# EAGLE board Keyboard_Scanner_Dual (EAGLE 9.5.0)
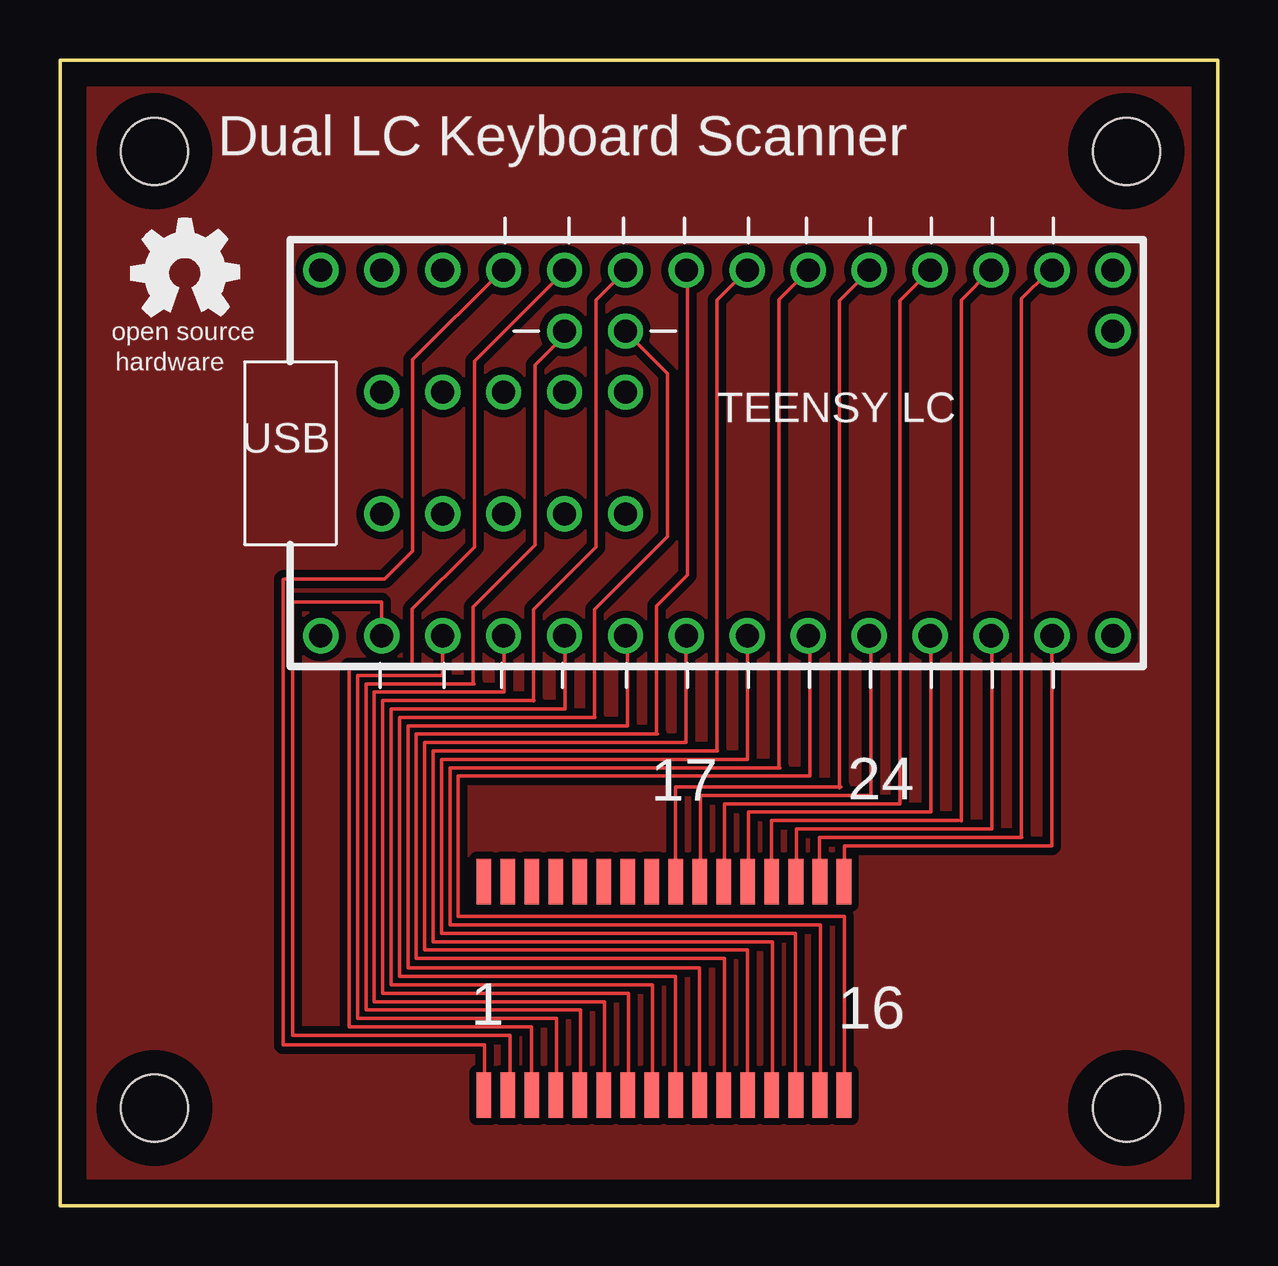
[diagram p0: board, top side]
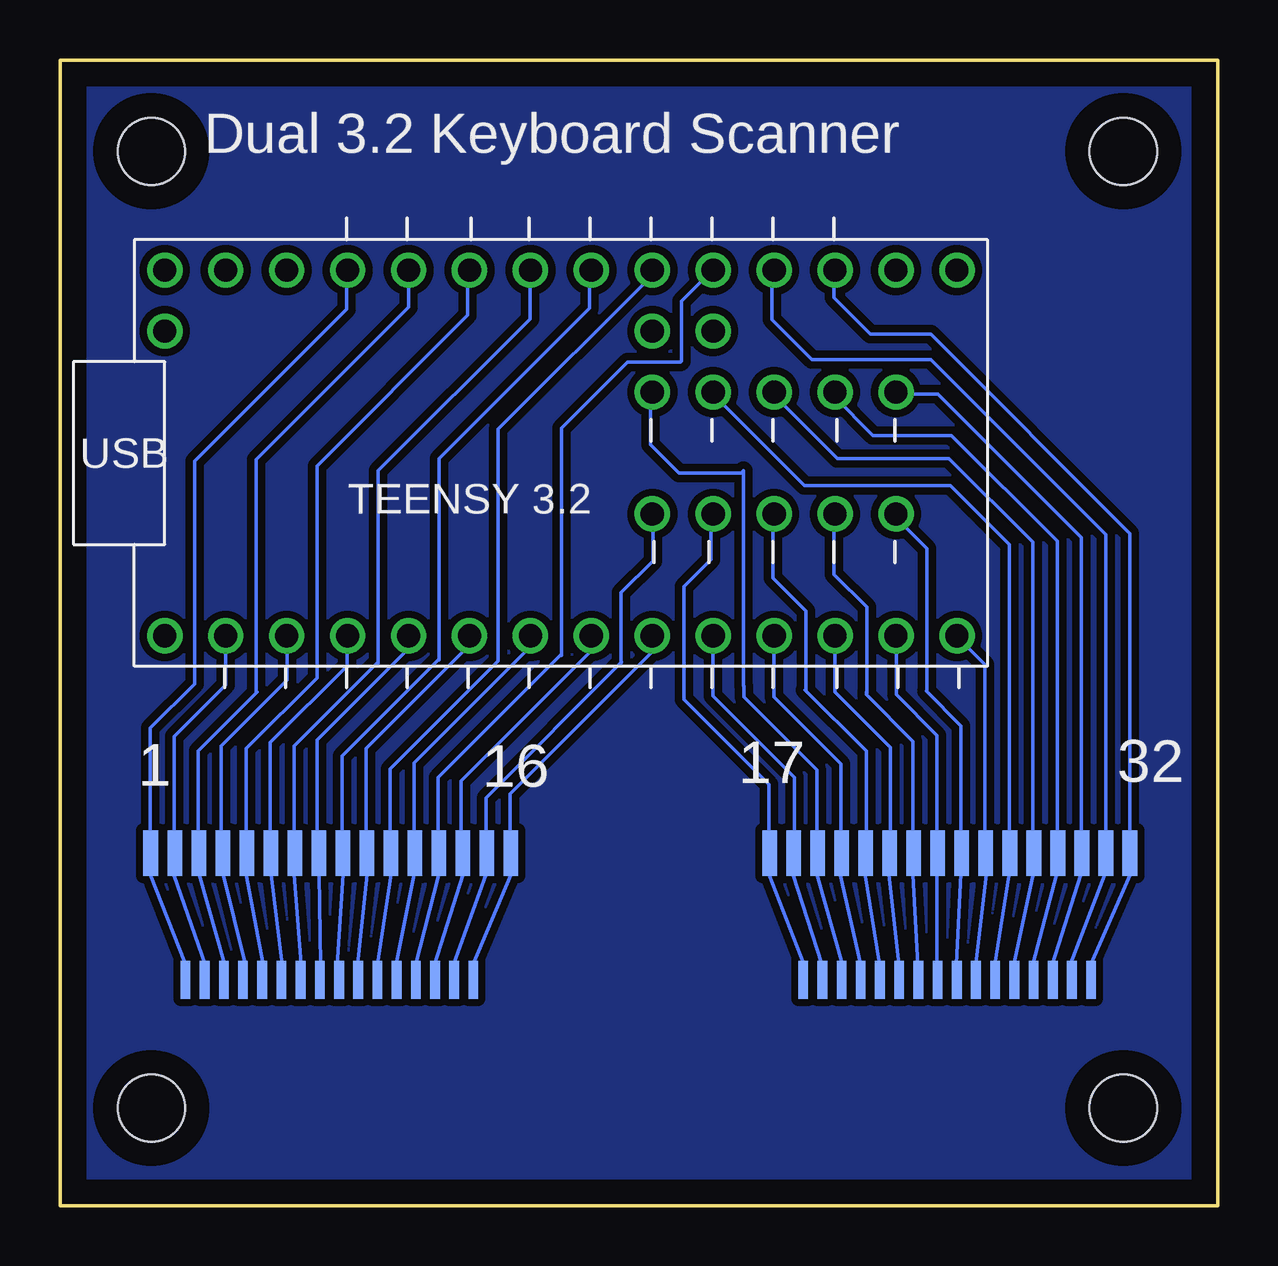
[diagram p1: board, bottom side, seen from below]

Size 48.26 x 47.75 mm. Coordinates in mm from the lower left corner, seen from the top.
Outline: 0,0 0,47.75 48.26,47.75 48.26,0 0,0
Copper layers (1*16): Top 0.035mm / dielectric 1.5mm / Bottom 0.035mm
Design rules "default": minimum track width 6mil, minimum drill 0.35mm, track to track 6mil, track to pad 6mil, pad to pad 6mil, via to via 6mil, smd to smd 6mil, copper to edge 40mil, drill to drill 6mil, minimum pad ring 10mil, minimum via ring 8mil, stop-mask expansion 4mil, vias tented up to drill 0mil, thermal gap 10mil
Holes 2.8 mm at 44.45,4.06 44.45,43.94 3.94,43.94 3.94,4.06

## Footprints (pad centres in the part's own frame; a part is rotated, then mirrored left to right if it is on the bottom)
TEENSY_COMBO = drill 0.965: 1 -11.43,7.62; 2 -13.97,7.62; 3 -16.51,7.62; 4 -6.35,5.08; 5 -3.81,5.08; 6 -3.81,2.54; 7 -6.35,2.54; 8 -8.89,2.54; 9 -11.43,2.54; 10 -13.97,2.54; 11 -13.97,-2.54; 12 -11.43,-2.54; 13 -8.89,-2.54; 14 -6.35,-2.54; 15 -3.81,-2.54; A -16.51,-7.62; B -13.97,-7.62; C -11.43,-7.62; D -8.89,-7.62; E -6.35,-7.62; F -3.81,-7.62; G -1.27,-7.62; H 1.27,-7.62; I 3.81,-7.62; J 6.35,-7.62; K 8.89,-7.62; L 11.43,-7.62; M 13.97,-7.62; N 16.51,-7.62; O 16.51,5.08; P 16.51,7.62; Q 13.97,7.62; R 11.43,7.62; S 8.89,7.62; T 6.35,7.62; U 3.81,7.62; V 1.27,7.62; W -1.27,7.62; X -3.81,7.62; Y -6.35,7.62; Z -8.89,7.62
FPC_DUAL = smd 0.61 x 1.905: 1 8.026,4.699; 2 7.026,4.699; 3 6.025,4.699; 4 5.024,4.699; 5 4.023,4.699; 6 3.023,4.699; 7 2.022,4.699; 8 1.021,4.699; 9 0.02,4.699; 10 -0.98,4.699; 11 -1.981,4.699; 12 -2.982,4.699; 13 -3.983,4.699; 14 -4.983,4.699; 15 -5.984,4.699; 16 -6.985,4.699; 17 8.026,-4.191; 18 7.026,-4.191; 19 6.025,-4.191; 20 5.024,-4.191; 21 4.023,-4.191; 22 3.023,-4.191; 23 2.022,-4.191; 24 1.021,-4.191; 25 0.02,-4.191; 26 -0.98,-4.191; 27 -1.981,-4.191; 28 -2.982,-4.191; 29 -3.983,-4.191; 30 -4.983,-4.191; 31 -5.984,-4.191; 32 -6.985,-4.191
FPC_DUAL_FRONT = smd 0.61 x 1.905 bottom: 1 8.026,0.889; 2 7.026,0.889; 3 6.025,0.889; 4 5.024,0.889; 5 4.023,0.889; 6 3.023,0.889; 7 2.022,0.889; 8 1.021,0.889; 9 0.02,0.889; 10 -0.98,0.889; 11 -1.981,0.889; 12 -2.982,0.889; 13 -3.983,0.889; 14 -4.983,0.889; 15 -5.984,0.889; 16 -6.985,0.889
FPC_DUAL_FRONT' = smd 0.406 x 0.813 bottom: 27 6.68,0.889; 28 5.88,0.889; 29 5.08,0.889; 30 4.28,0.889; 31 3.48,0.889; 32 2.68,0.889; 33 1.88,0.889; 34 1.079,0.889; 35 0.279,0.889; 36 -0.521,0.889; 37 -1.321,0.889; 38 -2.121,0.889; 39 -2.921,0.889; 40 -3.721,0.889; 41 -4.521,0.889; 42 -5.321,0.889; 63 -5.321,0.127; 64 -4.521,0.127; 65 -3.721,0.127; 66 -2.921,0.127; 67 -2.121,0.127; 68 -1.321,0.127; 69 -0.521,0.127; 70 0.279,0.127; 71 1.079,0.127; 72 1.88,0.127; 73 2.68,0.127; 74 3.48,0.127; 75 4.28,0.127; 76 5.08,0.127; 77 5.88,0.127; 78 6.68,0.127

## Placement (x,y rotation side)
E$1  [TEENSY_COMBO]  27.38,31.37 0 top
E$2  [FPC_DUAL]  24.65,8.8 0 top
E$3  [FPC_DUAL_FRONT]  10.65,13.8 0 top
E$4  [OSHW_5MM]  5.21,38.86 0 top
E$5  [FPC_DUAL_FRONT]  36.45,13.8 0 top
E$6  [FPC_DUAL_FRONT']  10.6,8.9 0 top
E$7  [FPC_DUAL_FRONT']  36.35,8.9 0 top

## Library data of the parts
E$1 = Teensy_Combo
E$2 = FPC_twin_front
E$3 E$5 = FPC_single_back_1mm
E$4 = oshw
E$6 E$7 = FPC_single_back_0p8mm

## Nets
S$33: E$1.R

## Tracks (layer width: path | path; a pad name or v marks a point on that pad's centre or on a via)
S$1
  Top 0.152: 13.45,23.8 13.4,23.8 13.4,25.15 9.7,25.15 9.7,7.1 18.75,7.1 18.75,5.5
S$2
  Top 0.152: 28.65,23.45 28.65,18.6 15.9,18.6 15.9,11.35
S$3
  Top 0.152: 16.25,11.75 16.25,18.25 30,18.25
S$4
  Top 0.152: 26.7,14.35 26.7,17.1 33.8,17.1 33.8,23.5
S$5
  Top 0.152: 28.7,14.35 28.7,16.4 36.3,16.4 36.3,23.6
S$6
  Top 0.152: 30.7,14.35 30.7,15.7 38.85,15.7 38.85,23.55
S$7
  Top 0.152: 41.35,23.55 41.35,15
S$8
  Top 0.152: 16.6,12.05 32.7,12.05 32.7,5.4
S$9
  Top 0.152: 27.4,18.95 15.55,18.95 15.55,11 29.7,11 29.7,5.45
S$10
  Top 0.152: 26.1,23.55 26.1,19.3 15.2,19.3 15.2,10.65 28.65,10.65 28.65,5.5
S$11
  Top 0.152: 23.6,23.6 23.65,23.6 23.65,20 14.5,20 14.5,9.9 26.65,9.9 26.65,5.5
S$12
  Top 0.152: 18.5,23.4 18.5,21.4
S$13
  Top 0.152: 15.95,23.65 15.95,22.1 12.4,22.1 12.4,7.8 20.7,7.8 20.7,5.5
S$14
  Bottom 0.152: 34.5,15.45 34.5,18.2 30,22.7 30,32.35
S$15
  Top 0.152: 14.7,22.45 12.05,22.45 12.05,7.45 19.65,7.45 19.65,5.55
S$16
  Top 0.152: 17.25,21.75 12.75,21.75 12.75,8.15 21.7,8.15 21.7,5.5
S$17
  Top 0.152: 18.5,21.4 13.1,21.4 13.1,8.5 22.7,8.5 22.7,5.45
S$18
  Top 0.152: 19.75,21.05 13.45,21.05 13.45,8.85 23.7,8.85 23.7,5.35
S$19
  Top 0.152: 21.05,23.65 21.05,20.7 13.8,20.7 13.8,9.2 24.7,9.2 24.7,5.35
S$20
  Top 0.152: 22.3,20.35 14.15,20.35 14.15,9.55 25.65,9.55 25.65,5.4
S$21
  Top 0.152: 24.9,19.65 14.85,19.65 14.85,10.3 27.7,10.3 27.7,5.5
S$22
  Top 0.152: 16.6,12.05 16.6,17.9 31.25,17.9 31.25,23.65
S$23
  Top 0.152: 25.65,14.3 25.65,17.45 32.55,17.45
S$24
  Top 0.152: 27.7,14.3 27.7,16.75 35,16.75
S$25
  Top 0.152: 29.65,14.3 29.65,16.05 37.45,16.05
S$26
  Top 0.152: 31.65,14.35 31.65,15.35 40.1,15.35
S$27
  Top 0.152: 32.7,14.15 32.7,15 41.35,15
S$28
  Top 0.152: 43.92,36.4 43.74,36.4
S$29
  Top 0.152: 16.25,11.7 31.7,11.7 31.7,5.45
S$30
  Top 0.152: 15.9,11.35 30.65,11.35 30.65,5.45
S$31
  Top 0.152: 41.33,38.91 41.2,38.91 40.08,37.8 40.08,15.37
S$32
  Top 0.152: 17.7,5.4 17.7,6.7 9.3,6.7 9.3,16.75 9.3,16.85 9.3,26.1
S$33
  Top 0.152: E$1.R 37.57,37.74 37.57,16.03
S$34
  Bottom 0.152: 10.85,23.7 9.7,22.55 9.7,15.45
S$35
  Top 0.152: 36.22,38.91 36.2,38.91 35,37.72 35,16.75
S$36
  Bottom 0.152: 12.15,21.45 10.7,20 10.7,15.5
S$37
  Top 0.152: 33.73,38.91 33.66,38.91
S$38
  Bottom 0.152: 13.4,23.7 13.4,21.3 11.7,19.6 11.7,15.5 11.75,15.45
S$39
  Top 0.152: 33.73,38.94 33.71,38.94 32.49,37.72 32.49,17.42
S$40
  Bottom 0.152: 14.65,21.4 14.65,21.3 12.7,19.35 12.7,15.45
S$41
  Top 0.152: 31.11,38.94 31.11,38.91 29.97,37.77 29.97,18.26
S$42
  Bottom 0.152: 15.95,23.7 15.95,21.4 13.65,19.1 13.65,15.45
S$43
  Top 0.152: 28.65,39.01 27.38,37.74 27.38,18.98
S$44
  Bottom 0.152: 17.2,21.5 14.65,18.95 14.65,15.5
S$45
  Top 0.152: 26.16,38.91 26.16,26.29 24.87,24.99 24.87,19.7
S$46
  Bottom 0.152: 18.5,23.75 18.5,21.2 15.7,18.4 15.7,15.5
S$47
  Top 0.152: 23.65,36.45 23.65,36.35 25.32,34.67 25.32,27.89 22.28,24.84 22.28,20.38
S$48
  Bottom 0.152: 19.75,21.65 19.75,21.2 16.7,18.15 16.7,15.5
S$49
  Top 0.152: 23.57,38.91 23.52,38.91 22.35,37.74 22.35,27.46 19.74,24.84 19.74,21.04
S$50
  Bottom 0.152: 21.05,23.75 21.05,21.25 17.65,17.85 17.65,15.5
S$51
  Top 0.152: 21.08,36.37 21.08,36.3 19.81,35.03 19.81,27.53 17.22,24.94 17.22,21.82
S$52
  Bottom 0.152: 22.25,21.7 22.25,21.1 18.7,17.55 18.7,15.5
S$53
  Top 0.152: 21.06,38.94 21.01,38.94 17.27,35.2 17.27,27.46 14.68,24.87 14.68,22.45
S$54
  Bottom 0.152: 42.65,21.75 44.5,19.9 44.5,15.4 44.5,15.35
S$55
  Top 0.152: 18.44,38.91 18.36,38.91 14.71,35.26 14.71,27.28 13.54,26.11 9.37,26.11
S$56
  Bottom 0.152: 41.35,23.75 41.35,21.7 43.5,19.55 43.5,15.45
S$57
  Bottom 0.152: 40.05,21.4 42.5,18.95 42.5,15.4
S$58
  Bottom 0.152: 38.8,23.75 38.8,21.9 41.55,19.15 41.55,15.55 41.55,15.45
S$59
  Bottom 0.152: 37.55,22 40.5,19.05 40.5,15.5
S$60
  Bottom 0.152: 36.3,23.75 36.3,22.5 39.5,19.3 39.5,15.55 39.55,15.5
S$61
  Bottom 0.152: 35,22.65 38.5,19.15 38.5,15.45
S$62
  Bottom 0.152: 33.75,23.75 33.75,23.2 37.55,19.4 37.55,15.5
S$63
  Bottom 0.152: 32.5,22.75 36.5,18.75 36.5,15.55 36.5,15.5
S$64
  Bottom 0.152: 31.25,23.75 31.25,23.3 35.5,19.05 35.5,15.45
S$65
  Bottom 0.152: 28.6,23.75 28.6,23.35 33.5,18.45 33.5,15.35
S$66
  Bottom 0.152: 27.4,22.95 32.5,17.85 32.5,15.45
S$67
  Bottom 0.152: 26.15,23.7 26.15,23.1 31.55,17.7 31.55,15.35 31.45,15.25
S$68
  Bottom 0.152: 24.85,22.65 30.5,17 30.5,15.4
S$69
  Bottom 0.152: 23.6,23.75 23.6,23.05 29.5,17.15 29.5,15.3
S$70
  Bottom 0.152: 3.65,13.8 5.3,10.05
S$71
  Bottom 0.152: 4.7,13.8 6.15,10.05
S$72
  Bottom 0.152: 5.7,13.8 6.9,10.05
S$73
  Bottom 0.152: 6.7,13.85 7.7,10.05
S$74
  Bottom 0.152: 7.7,13.75 8.5,10.05
S$75
  Bottom 0.152: 8.7,13.75 9.3,10.05
S$76
  Bottom 0.152: 9.65,13.8 10.1,9.9 10.1,9.95
S$77
  Bottom 0.152: 10.7,13.85 10.9,10.05
S$78
  Bottom 0.152: 11.7,13.8 11.7,10.05 11.7,10
S$79
  Bottom 0.152: 12.7,13.8 12.5,10
S$80
  Bottom 0.152: 13.7,13.8 13.3,10.05
S$81
  Bottom 0.152: 14.7,13.85 14.1,10.1
S$82
  Bottom 0.152: 15.75,13.85 14.9,10.1
S$83
  Bottom 0.152: 16.7,13.8 15.65,10.05
S$84
  Bottom 0.152: 17.7,13.8 16.5,10.05
S$85
  Bottom 0.152: 18.7,13.8 17.25,10.05
S$86
  Bottom 0.152: 29.45,13.8 31.05,10.05
S$87
  Bottom 0.152: 30.5,13.8 31.85,10.05
S$88
  Bottom 0.152: 31.45,13.8 32.65,10.05
S$89
  Bottom 0.152: 32.45,13.85 33.45,9.95
S$90
  Bottom 0.152: 36.32,38.91 36.32,37.36 42.65,31.04 42.65,21.74
S$91
  Bottom 0.152: 33.5,13.8 34.25,10.05
S$92
  Bottom 0.152: 33.73,38.91 33.73,37.44 40.08,31.09 40.08,21.41
S$93
  Bottom 0.152: 34.45,13.8 35.05,9.95
S$94
  Bottom 0.152: 31.27,38.96 31.27,37.11 37.54,30.84 37.54,22
S$95
  Bottom 0.152: 35.45,13.8 35.85,10.05
S$96
  Bottom 0.152: 28.68,38.91 28.68,36.96 35,30.63 35,22.59
S$97
  Bottom 0.152: 36.45,13.8 36.7,10
S$98
  Bottom 0.152: 26.19,38.91 26.19,37.41 32.46,31.14 32.46,22.73
S$99
  Bottom 0.152: 37.45,13.8 37.4,10.05
S$100
  Bottom 0.152: 23.65,38.96 23.65,38.71 30,32.36
S$101
  Bottom 0.152: 38.5,13.8 38.2,10.05
S$102
  Bottom 0.152: 21.03,38.96 21.08,38.96 22.35,37.69 22.35,35.2 22.4,35.15 24.61,35.15 27.36,32.41 27.36,22.93
S$103
  Bottom 0.152: 39.45,13.8 39,10.05
S$104
  Bottom 0.152: 23.55,28.75 23.55,26.87 24.87,25.55 24.87,22.59
S$105
  Bottom 0.152: 40.5,13.8 39.8,10.05
S$106
  Bottom 0.152: 21.13,28.75 21.13,26.92 22.25,25.8 22.25,21.67
S$107
  Bottom 0.152: 41.45,13.8 40.55,10.1
S$108
  Bottom 0.152: 23.65,33.83 23.65,31.73 22.45,30.53 19.86,30.53 19.76,30.63 19.76,21.66
S$109
  Bottom 0.152: 42.45,13.8 41.4,10.05 41.45,10.1
S$110
  Bottom 0.152: 18.54,28.75 18.54,26.16 17.17,24.79 17.17,21.51
S$111
  Bottom 0.152: 43.5,13.75 42.2,10.05
S$112
  Bottom 0.152: 16,28.8 16,26.31 14.63,24.95 14.63,21.37
S$113
  Bottom 0.152: 44.5,13.8 43.05,10.1
S$114
  Bottom 0.152: 13.44,28.65 13.39,28.65 12.12,27.38 12.12,21.45
S$116
  Bottom 0.152: 21.08,33.83 21.03,33.83 17.22,30.02 11.15,30.02 8.68,27.55 8.68,15.56
S$117
  Bottom 0.152: 18.54,33.83 15.85,31.14 11.2,31.14 7.71,27.65 7.71,15.49
S$118
  Bottom 0.152: 16,33.83 16,33.73 14.38,32.11 11.1,32.11 6.7,27.7 6.7,15.49
S$119
  Bottom 0.152: 13.34,33.83 11.66,33.83 5.68,27.86 5.68,15.48
S$120
  Bottom 0.152: 18.59,38.96 18.59,36.93 16.92,35.26 11.96,35.26 4.67,27.96 4.67,15.48
S$121
  Bottom 0.152: 16,38.91 16,37.85 14.48,36.32 11.96,36.32 3.66,28.02 3.66,15.48
S$124
  pour Top (isolate 0.305): 0,0 0,47.75 48.26,47.75 48.26,0
S$125
  pour Bottom (isolate 0.305): 0,0 0,47.75 48.26,47.75 48.26,0

## Text on the board
tPlace: Dual LC Keyboard Scanner | 17 | 24 | 1 | 16
bPlace: Dual 3.2 Keyboard Scanner | 32 | 17 | 16 | 1